# Altium PCB Lipol_battery_charger.PcbDoc
Units mm, origin at the board's own origin, x right, y up, seen from the top; angles counter-clockwise.
Board outline 66.04 x 66.04 mm, 2 copper layers (Top Layer, Bottom Layer); 22 components, 10 nets, 59 pads, 9 vias.
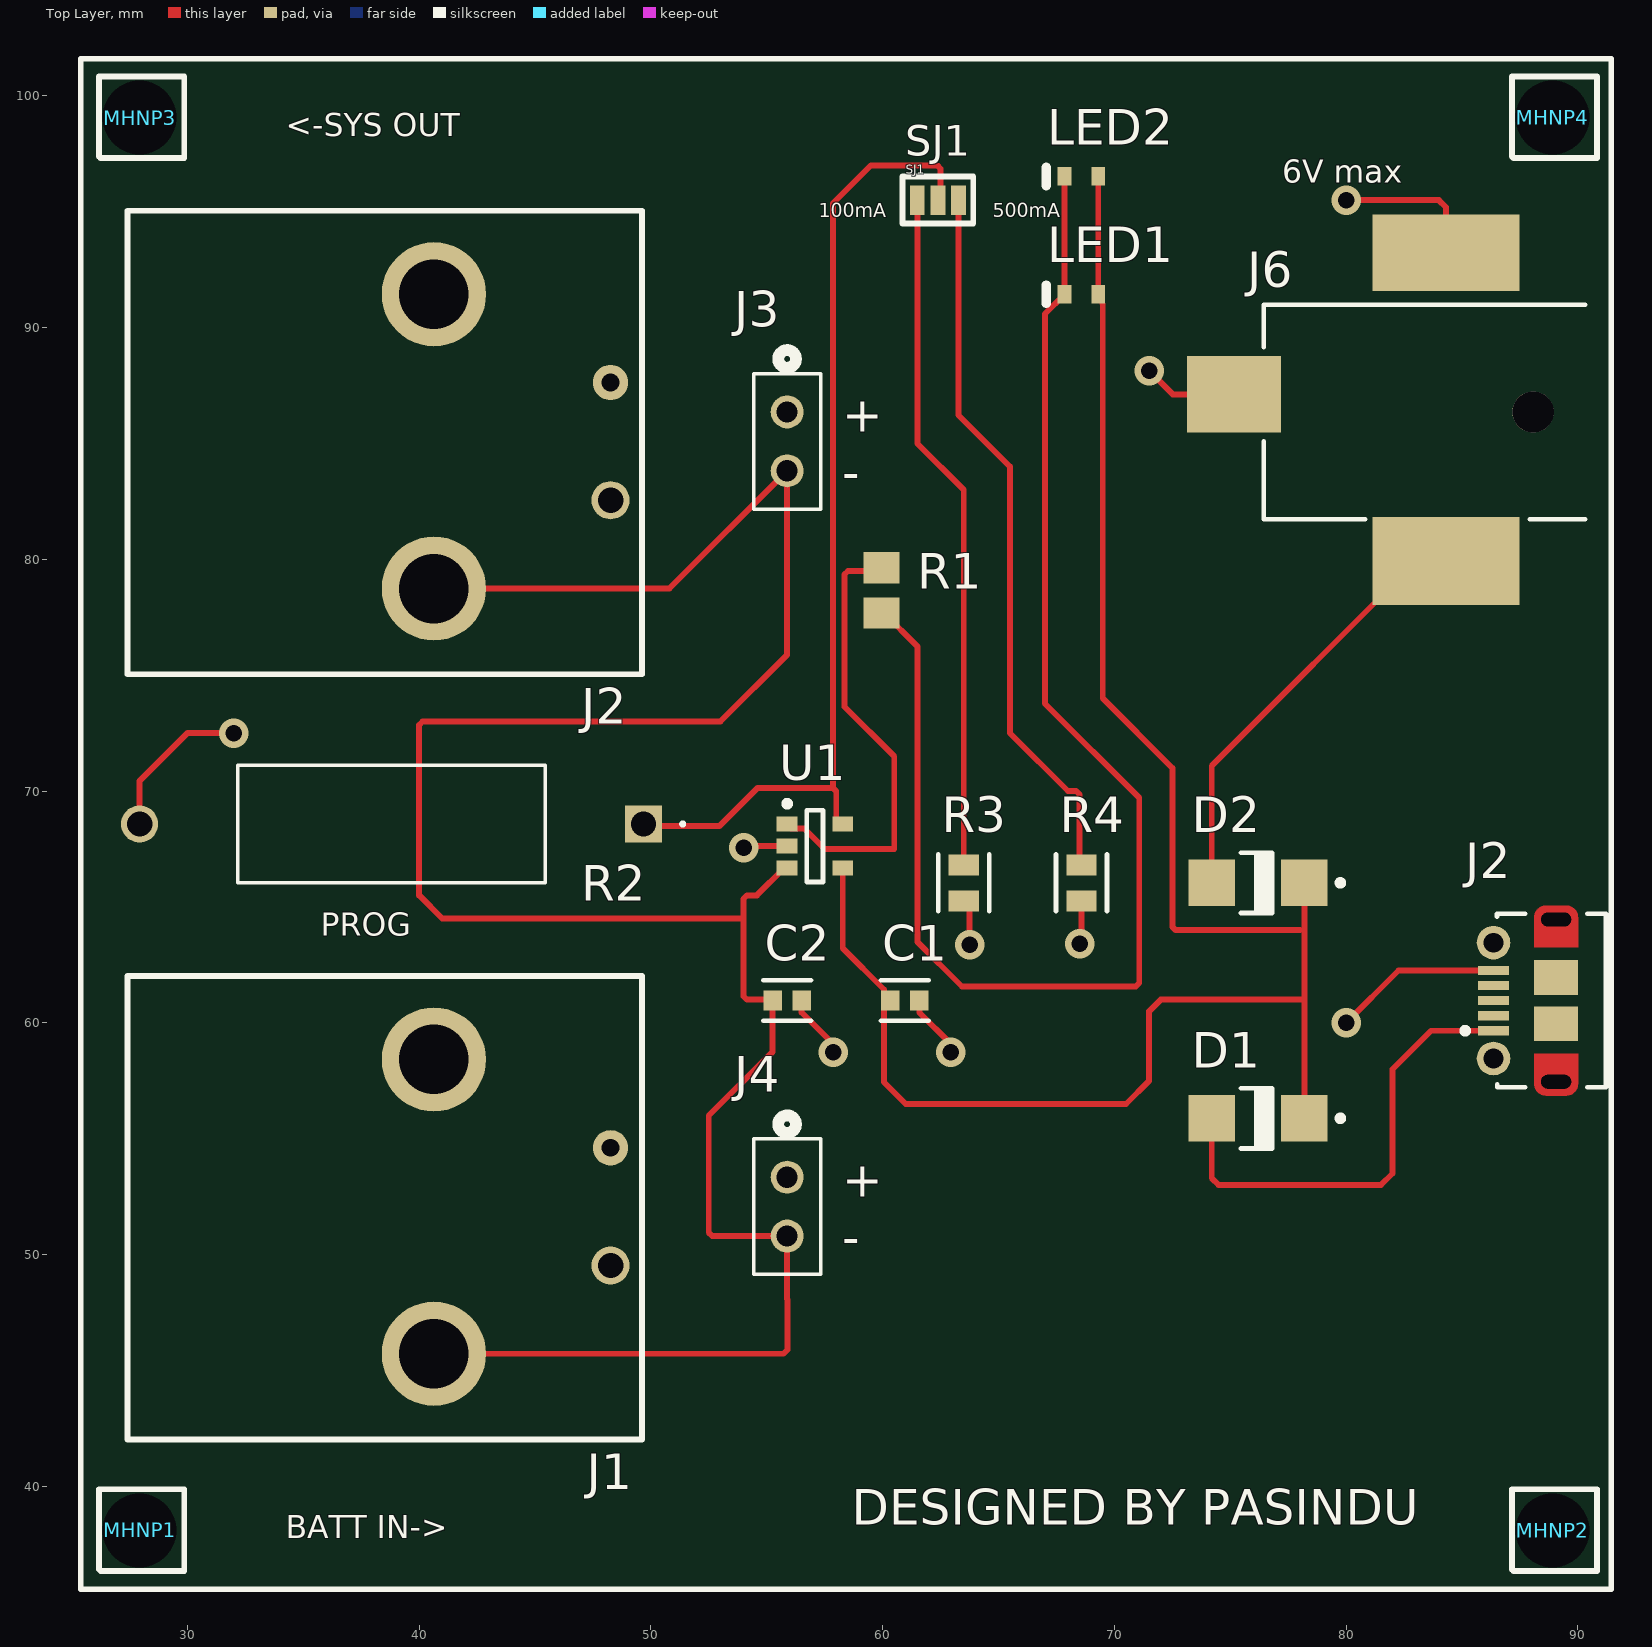
[diagram p0: Top Layer view]
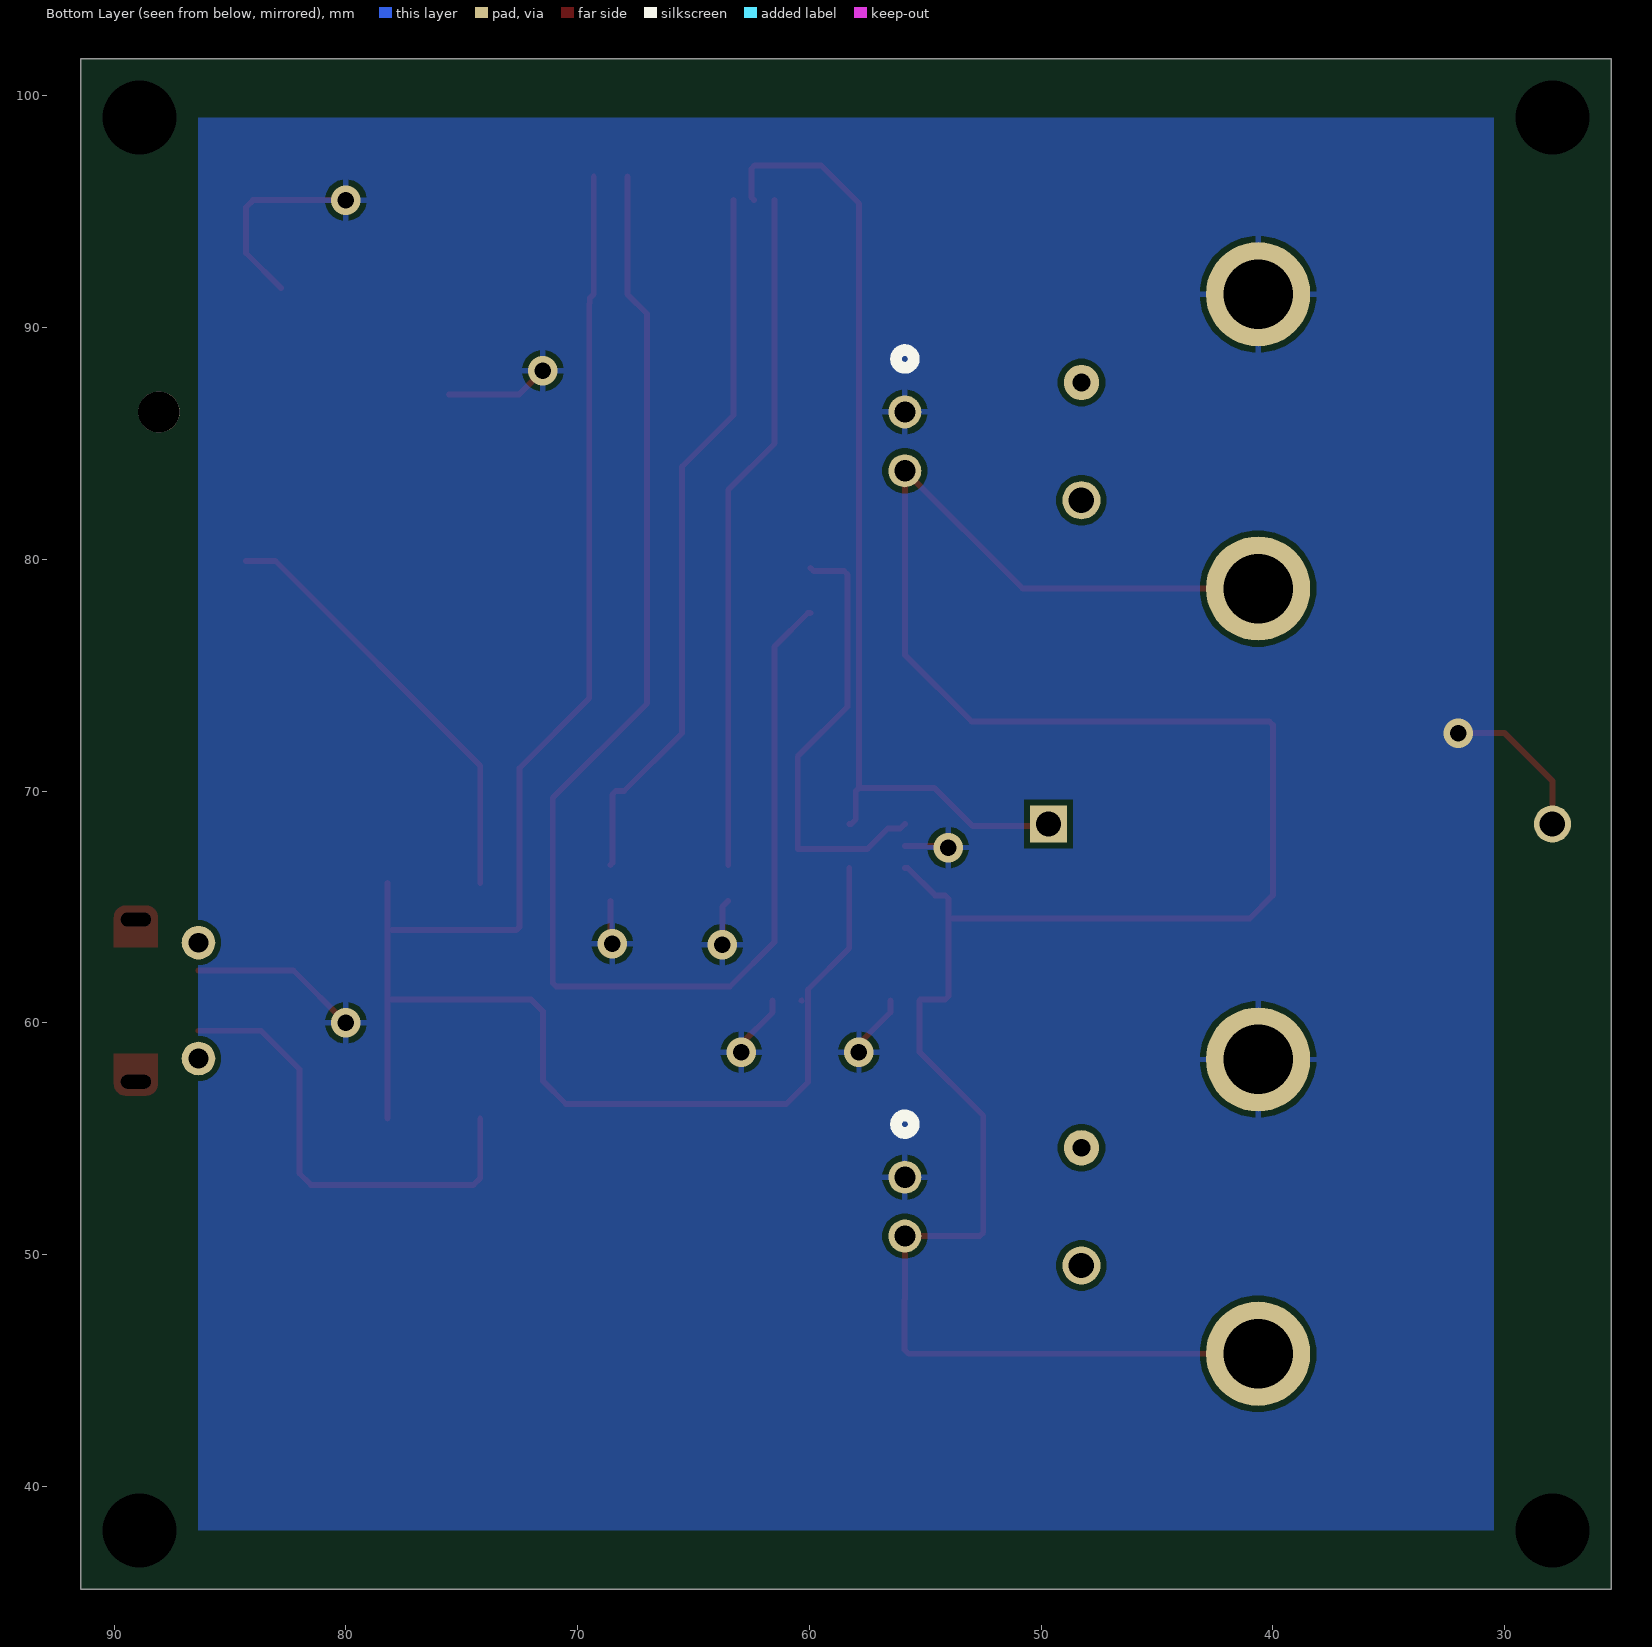
[diagram p1: Bottom Layer view, seen from below]
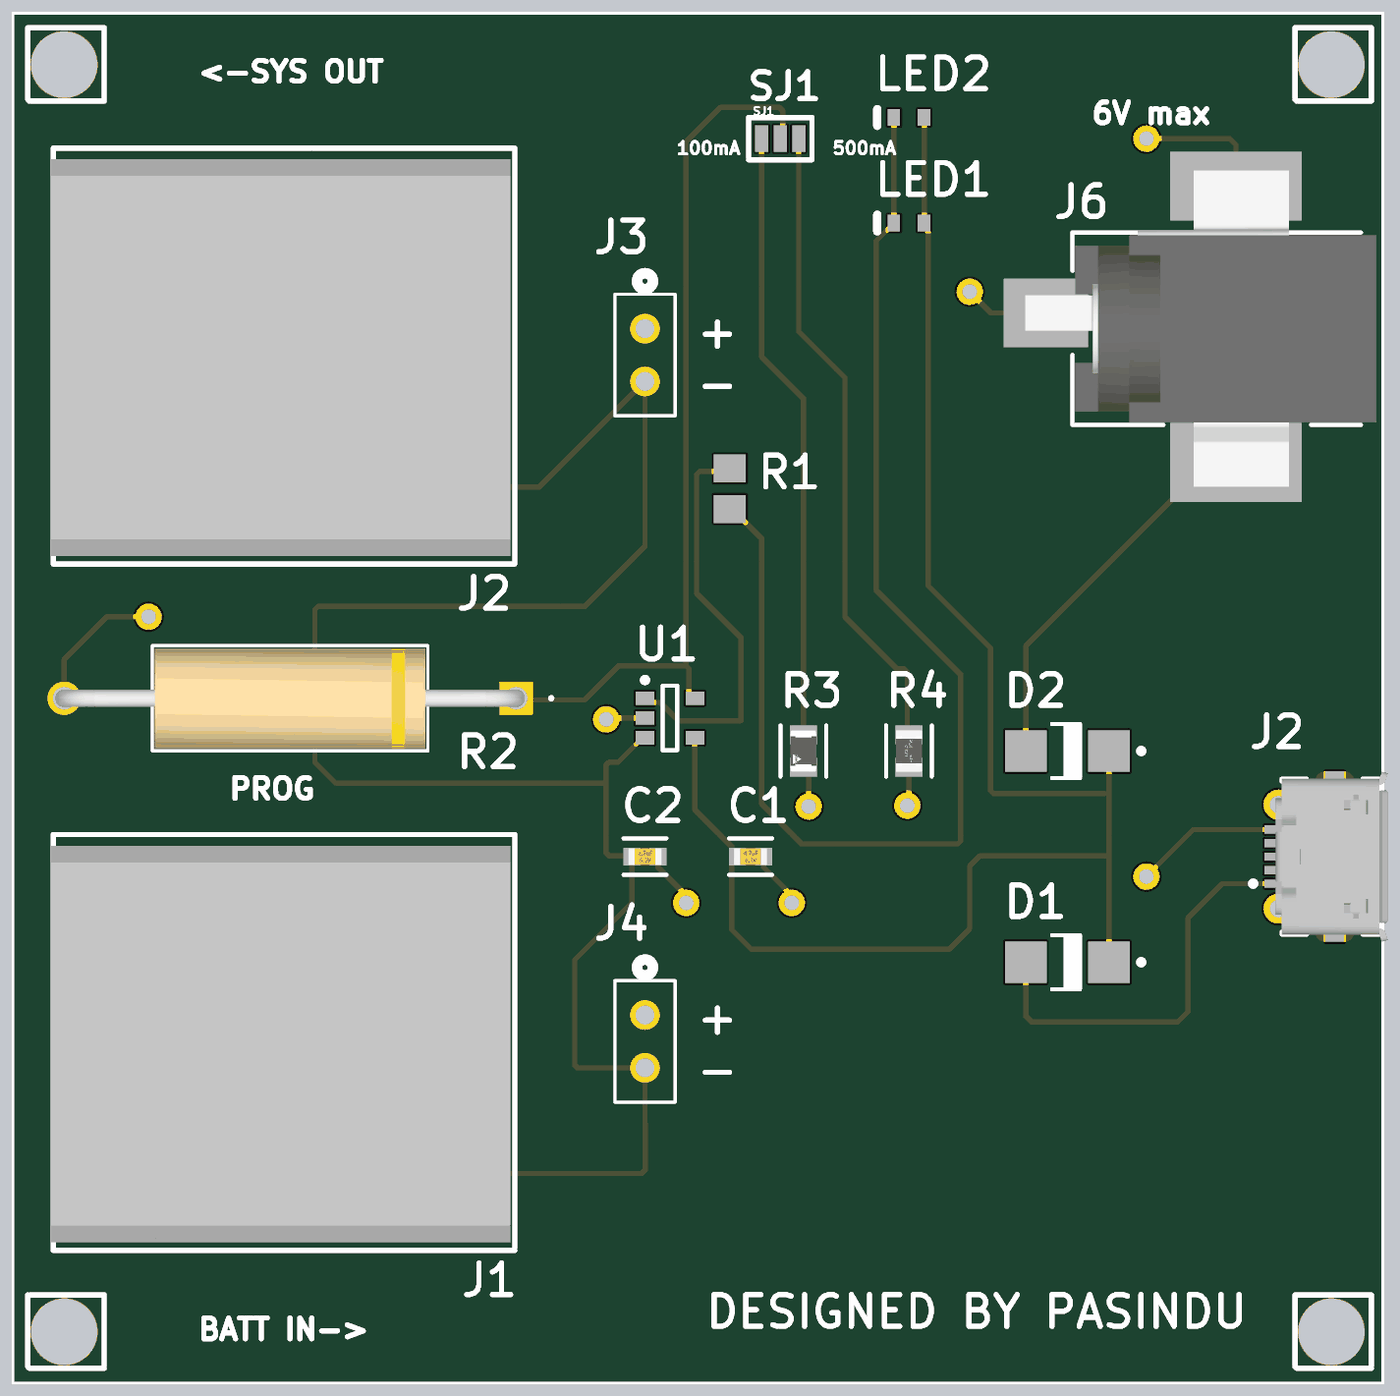
[diagram p2: 3D render of the assembled board from above, using the file's embedded part models]

## Layer stack, top to bottom
Top Solder: solder mask 0.0102, Solder Resist, Dk 3.5
Top Layer: signal copper 0.0356
Dielectric 1: dielectric 0.32, FR-4, Dk 4.8
Bottom Layer: signal copper 0.0356
Bottom Solder: solder mask 0.0102, Solder Resist, Dk 3.5

## Board outline
25.4,35.56 25.4,101.6 91.44,101.6 91.44,35.56

## Design rules (kind name [scope] priority, off if disabled: settings)
Clearance [All] p1: gap=0.254 ignorepadtopadclearanceinfootprint=FALSE
PolygonConnect [All] p1: connectstyle=Relief reliefconductorwidth=0.254 reliefentries=4 polygonreliefangle="90 Angle" airgapwidth=0.254
RoutingVias [All] p1: holewidth=0.711 width=1.27 viastyle="Through Hole" minholewidth=0.711 minwidth=1.27 maxholewidth=0.711 maxwidth=1.27
SolderMaskExpansion [All] p1: expansion=0.102 istentingtop=FALSE
SupplyNets "Schematic Supply Nets" [InNet('GND')] p1: voltage=0.000
Width [All] p1: maxlimit=0.254 minlimit=0.254 preferedwidth=0.254
30 further rules are at their usual default settings.

## Classes and differential pairs
component class Lipol_battery_charger: C1 C2 D1 D2 J3 J4 J6 LED1 LED2 MHNP1 MHNP2 MHNP3 MHNP4 R1 R2 R3 R4 SJ1 U1

## Components (designator, comment, footprint, x,y, rotation, side; value= is the part's Value field where it differs from the comment)
C1 "4.7uF" FP-CL10-IPC_C 60.96,60.96 r0 top
C2 "4.7uF" FP-CL10-IPC_C 55.88,60.96 r0 top
D1 "Diode1" ONSC-SMA-2-403D-02_V 76.2,55.88 r180 top
D2 "Diode2" ONSC-SMA-2-403D-02_V 76.2,66.04 r180 top
J1 "1-179276-2" 1-179276-2 40.64,58.42 r270 top
J2 "1-179276-2" 1-179276-2 40.64,91.44 r270 top
J2 "Micro-USB B Receptacle" USB-MICRO-B_V 87.71,60.96 r90 top
J3 "2POS VER HDR" CONN2_M20-999_1x2_HRW 55.88,86.36 r90 top
J4 "2POS VER HDR" CONN2_M20-999_1x2_HRW 55.88,53.34 r90 top
J6 "Power jack" FP-RASM722PTR13X-MFG 83.82,86.36 r90 top
LED1 "Red" VISH-TLMX1100_V 68.58,91.44 r180 top
LED2 "Red" VISH-TLMX1100_V 68.58,96.52 r180 top
MHNP1 "Mounting hole non plated 3.2mm" MHNP3P2MM 27.94,38.1 r90 top
MHNP2 "Mounting hole non plated 3.2mm" MHNP3P2MM 88.9,38.1 r90 top
MHNP3 "Mounting hole non plated 3.2mm" MHNP3P2MM 27.94,99.06 r90 top
MHNP4 "Mounting hole non plated 3.2mm" MHNP3P2MM 88.9,99.06 r90 top
R1 "330" RESC2013X70X40ML20T20 59.96,78.66 r90 top
R2 "PROG" RES_AC03_VIS 49.682,68.58 r180 top
R3 "2k" FP-CRCW0805-HPe3-IPC_C 63.5,66.04 r90 top
R4 "10k" FP-CRGCQ0805-IPC_C 68.58,66.04 r90 top value=10KΩ
SJ1 "SJUMPER3POS" SJUMPER3POS-Footprint-1 62.389,95.5 r0 top
U1 "MCP73811T-420I/OT" SOT-23-OT5_L 57.08,67.63 r0 top

## Footprints (in the part's own frame and the unit in brackets; to place one, negate y for a bottom-side part, rotate by r counter-clockwise, add the part's x,y. Pads: shape width x height; smd on the part's side, far side on the other; paste and mask are expansions set on the pad)
1-179276-2 [mm] "2_PCS_HDR_19.08X22.1MM"
  round 4.5 hole 3: ""(0,0) ""(12.7,0)
  round 1.524 hole 0.762: ""(3.81,7.62)
  round 1.65 hole 1.1: ""(8.89,7.62)
  silkscreen extent -3.6,-13.23 16.4,8.97, body extent -3.07,-13.33 16.02,8.78, height 10.86
CONN2_M20-999_1x2_HRW [mil]
  round 56 / inner round 60 / far side round 56 hole 36 paste-99999 mask+0: 1(0,0) 2(-100,0)
  silkscreen extent -165,-57 105,57
FP-CL10-IPC_C [mm]
  rect 0.806x0.858 smd paste+0 mask+0: 1(-0.626,0) 2(0.626,0)
  silkscreen extent -1.03,-0.87 1.03,0.87, body extent -1.13,-0.58 1.13,0.58, height 0.25
FP-CRCW0805-HPe3-IPC_C [mm]
  rect 0.906x1.308 smd paste+0 mask+0: 1(-0.776,0) 2(0.776,0)
  silkscreen extent -1.23,-1.1 1.23,1.1, body extent -1.33,-0.8 1.33,0.8, height 0.25
FP-CRGCQ0805-IPC_C [mm]
  rect 0.906x1.31 smd paste+0 mask+0: 1(-0.776,0) 2(0.776,0)
  silkscreen extent -1.23,-1.1 1.23,1.1, body extent -1.33,-0.8 1.33,0.8, height 0.25
FP-RASM722PTR13X-MFG [mm]
  rect 3.3x4.06 smd paste+0 mask+0: 1(0.76,8.65)
  rect 3.81x6.35 smd paste+0 mask+0: 2(-6.43,-0.49)
  rect 3.3x6.35 smd paste+0 mask+0: 3(6.86,-0.49)
  round 1.78 hole 1.78 unplated paste-2539.97 mask+0: ""(0,-4.25)
  silkscreen extent -4.63,-6.5 4.63,7.38, body extent -8.43,-7.48 8.61,10.78, height 0.25
MHNP3P2MM [mm] "Mountimg hole non plated 3.2mm"
  round 1 hole 3.2: ""(0,0)
  silkscreen extent -1.75,-1.92 1.78,1.75
ONSC-SMA-2-403D-02_V [mm] "Molded, 2-Leads, Body 4.57x2.92mm"
  rect 2x2 smd: 1(-2,0) 2(2,0)
  silkscreen extent -3.67,-1.3 0.74,1.3, body extent -2.16,-1.3 2.16,1.3, height 2.2
RES_AC03_VIS [mil]
  rect 63x63 / inner round 60 / far side rect 63x63 hole 43 paste-99999 mask+0: 1(0,0)
  round 63 hole 43 paste-99999 mask+0: 2(856,0)
  silkscreen extent -70,-99 689,100, body extent -16,-95 873,95, height 189
RESC2013X70X40ML20T20 [mm] "Chip Resistor, 2-Leads, Body 2.00x1.25mm, IPC Low Density"
  rect 1.35x1.55 smd: 1(-0.975,0) 2(0.975,0)
  body extent -1.1,-0.72 1.1,0.72, height 0.7
SJUMPER3POS-Footprint-1 [mil]
  rect 25x50 smd: 1(-35,0) 2(0,0) 3(35,0)
  silkscreen extent -60,-40 60,40
SOT-23-OT5_L [mm] "SOT23, 5-Leads, Body 2.9x1.7mm, Pitch 0.95mm, Lead Span 2.8mm, IPC High Density"
  rect 0.9x0.65 smd: 1(-1.2,0.95) 2(-1.2,0) 3(-1.2,-0.95) 4(1.2,-0.95) 5(1.2,0.95)
  silkscreen extent -1.32,-1.55 0.35,1.95, body extent -0.9,-1.55 0.9,1.55, height 1.45
USB-MICRO-B_V [mm] "USB, MICRO B, Body 7.491x4.695 mm, Pitch 0.65 mm"
  rect 0.4x1.35 smd: 1(-1.3,1.35) 2(-0.65,1.35) 3(0,1.35) 4(0.65,1.35) 5(1.3,1.35)
  round 1.45 hole 0.85: 6(-2.5,1.35) 7(2.5,1.35)
  rrect50% 0x0 hole 0.6 slot 1.3 at 90 deg: 8(-3.5,-1.35) 11(3.5,-1.35)
  rect 1.5x1.9 smd: 9(-1,-1.35) 10(1,-1.35)
  Top Layer circle w0.5: c-3.6,-1.8 r0.25
  Top Layer circle w0.5: c-3.6,-0.9 r0.25
  Top Layer circle w0.5: c3.6,-1.8 r0.25
  Top Layer circle w0.5: c3.6,-0.9 r0.25
  Top Layer region: -3.6,-1.8 -3.6,-0.9 -4.1,-0.9 -4.1,-1.8
  Top Layer region: 3.6,-0.9 3.6,-1.8 4.1,-1.8 4.1,-0.9
  Top Layer region: 2.3,-0.4 2.3,-2.3 3.6,-2.3 3.6,-0.4
  Top Layer region: -2.3,-2.3 -2.3,-0.4 -3.6,-0.4 -3.6,-2.3
  silkscreen extent -3.75,-3.5 3.75,2.7, body extent -4.1,-3.9 4.1,1.5, height 2.67
VISH-TLMX1100_V [mm] "SMD, 2-Leads, Body 1.6x0.8mm"
  rect 0.6x0.8 smd: 1(-0.725,0) 2(0.725,0)
  silkscreen extent 1.53,-0.4 1.53,0.4, body extent -0.8,-0.4 0.8,0.4, height 0.65

## Part data
C1 C2: library part CMP-2000-06096-2, "CAP CER 4.7UF 6.3V X7R 0603", Manufacturer=Samsung, Manufacturer Part Number=CL10B475KQ8NQNC, Package=CL10, Temperature="-55°C to +125°C", Temperature Characteristic=X7R, Temperature Coefficient=15%, Temperature Range High=+125°C, Temperature Range Low=-55°C, Tolerance=10%, Voltage Rating=6.3V, Automotive=No, Capacitance=4.7uF, Category=Cap, ComponentLink2Description=Datasheet, ComponentLink2URL=http://www.samsungsem.com/kr/support/product-search/mlcc/__icsFiles/afieldfile/2018/07/24/CL10B475KQ8NQNC.pdf, Device Class L1="Passive Components", Device Class L2=Capacitors, Device Class L3="Ceramic Capacitors", Digikey Description="CAP CER 4.7UF 6.3V X7R 0603", Height=0.95mm, Ipc Land Pattern Name=CAPC16080X80, Lead Free=Yes, Material=Ceramic, Mouser Description="C Series 0402 4.7 uF 6.3 V ±20 % Tolerance X5R SMT Multilayer Ceramic Capacitor", Octopart=https://octopart.com/cl10b475kq8nqnc-samsung-24957976, RoHS=TRUE
D1 D2: library part CMP-1055-00320-1, "Schottky Power Rectifier, 2-Pin SMA, Pb-Free, Tape and Reel", Manufacturer="On Semiconductor", PartNumber=MBRA140T3G, ComponentLink1Description="Manufacturer URL", ComponentLink1URL=http://www.onsemi.com/, ComponentLink2Description=Datasheet, ComponentLink2URL=http://www.onsemi.cn/pub_link/Collateral/MBRA140T3-D.PDF, ComponentLink3Description="Package Specification", ComponentLink3URL=http://www.onsemi.com/pub_link/Collateral/403D-02.PDF, Configuration=Single, DatasheetVersion="Rev. 10", IFSM Max (A)=30, Mounting Technology="Surface Mount", PackageDescription="2-Pin Small Molded Package, J-Bend Lead, Body 2.605 x 4.315 mm", PackageReference=SMA-2-403D-02, PackageVersion="Rev. G, 07/2012", Packing="Tape and Reel", RoHS=TRUE
J1 J2: "DYNAMIC 3200 HDR ASSY 2P H", Manufacture="TE connectivity", Supplier Part Number 1=7189696P, ComponentLink1Description="product URL", ComponentLink1URL=https://octopart.com/search?q=1-179276-2&filter%5Bfields%5D%5Bbrand.name%5D%5B%5D=TE+Connectivity, Manufacture part Number=1-179276-2, Supplier 1=Rs
J2: library part CMP-2000-05827-1, "Micro-USB B Receptacle, Right Angle, Bottom Mount, Surface Mount, with Solder Tabs, -30 to 85 degC, 5-Pin USB, RoHS, Tape and Reel", Manufacturer=Molex, Package Description="5-Leads USB, Micro B, Body 7.5 x 5 mm, Pitch 0.65 mm", Package Reference=MICRO-B, Package Version="Rev. F, 12/2012", Standard Package=1, Voltage - Max=30V, 3D Model=105017-0001.stp, Catalog Drawings=1050170001, Category=Connectors,Interconnects, Circuits=5, Connector Type=USB-microB, Datasheet URL=http://www.molex.com/elqNow/elqRedir.htm?ref=http://www.molex.com/webdocs/datasheets/pdf/en-us/1050170001_IO_CONNECTORS.pdf, Datasheet Version=03/2016, Family=USB,DVI,HDMIConnectors, Featured Product=Micro-USBConnectorsUSBConnectors, Features=Shielded,SolderRetention, Gender=Receptacle, Ingress Protection=-, Manufacturer URL=http://www.molex.com/, Mating Products=WM17145-ND-CABLEMICROUSBBTOSTDA1.0MWM17147-ND-CABLEMICROUSBBTOSTDA2.0MWM17146-ND-CABLEMICROUSBBTOSTDA1.5M, Mounting Technology=SurfaceMount, Mounting Type=BoardCutout,SurfaceMount,RightAngle, Number of Contacts=5, Online Catalog=Molex-MicroUSB, Other Names=WM1399DKR, Package URL=http://www.molex.com/pdm_docs/sd/1050170001_sd.pdf, Packaging=Digi-Reel®, PCN Assembly/Origin=ResinSupplier21/Oct/2015, RoHS Information=1050170001CertofCompliance, Series=-, Specifications=-
J3 J4: library part M20-9990246, "Connector Header Through Hole 2 position 0.100\" (2.54mm)", Mfr_Name=Harwin, ComponentLink1Description="New link", ComponentLink2Description="New link 1", ComponentLink2URL=https://www.digikey.com/en/products/detail/harwin-inc/M20-9990246/3728226, RefDes=RefDes, Type=Type
J6: library part CMP-47995-000002-1, "CONN PWR JACK 2.1X5.5MM SOLDER", Case/Package=SMD/SMT, Color=Black, Current Rating=5A, Package Quantity=120, Connector Type=Jack, Contact Material="Copper Alloy", Contact Plating=Tin, Gender=Male, Housing Color=Black, Housing Material=Thermoplastic, Mount="Surface Mount", Shielding=Unshielded, Termination=Solder
LED1 LED2: library part CMP-1666-00027-1, "LED, RED, 2.1 V, -40 to 100 degC, 2-Pin SMD (0603), RoHS, Tape and Reel", Capacitance="12 pF", Case Code (Imperial)=0603, Case Code (Metric)=1608, Max Operating Temperature=125degC, Min Operating Temperature=-55degC, Package Quantity=4000, Resistance="100000000000 Ohm", Tolerance=5%, Type (Capacitors)=C0G, Voltage Rating="50 V", Case/Package=0603, ComponentLink1Description="Manufacturer URL", ComponentLink1URL=http://www.vishay.com/, ComponentLink2Description=Datasheet, ComponentLink2URL=http://www.vishay.com/docs/83173/tlmb1100.pdf, DatasheetVersion="Rev. 2.7, 03/2016", Height="0.8 mm", Length="1.6 mm", Mount="Surface Mount", PackageDescription="2-Pin Surface Mount Device, Body 1.6 x 0.8 mm", PackageReference=TLMX1100, Packaging="Tape and Reel", Pins=2, Radiation Hardening=No, REACH SVHC="No SVHC", RoHSCompliant=True, Voltage Rating (DC)="50 V", Width="0.8 mm"
MHNP1 MHNP2 MHNP3 MHNP4: library part MTHNP3P2MM, "Mounting hole non plated 3.2mm drill hole"
R1: library part CMP-2001-00533-1, Manufacturer=Panasonic, Part Number=ERJ6ENF3301V
R2: library part CMP-00030-39745976-1, "AC03000001009JAC00 VISHAY AC03000001009JAC00 Through Hole Resistor, 10 ohm, Axial Leaded, 3 W, 5%, AC Series", Case/Package=Conformal, Max Operating Temperature=275°C, Max Power Dissipation=3W, Min Operating Temperature=0°C, Resistance=10Ω, Temperature Coefficient=-80ppm/°C, Tolerance=5%, Voltage Rating=5V, Composition=Wirewound, Contact Plating=Tin, Diameter=4.8mm, Features="Flame Retardant Coating", Lead Diameter=800µm, Length=13mm, Military Standard=Not, Mount="Through Hole", NexarPartId=39745976, Number of Pins=2, Number of Terminations=2, Packaging="Cut Tape (CT)", Power Rating=3W, Radiation Hardening=No, REACH SVHC=Unknown, RoHS=Compliant, Schedule B="8533210080, 8533210080", Termination=Axial, Voltage Rating (DC)=5V, Width=4.8006mm
R3: library part CMP-2001-04188-2, "RES Thick Film, 2kΩ, 1%, 0.5W, 100ppm/°C, 0805", Case Code (Imperial)=0805, Case Code (Metric)=2012, Max Operating Temperature=155°C, Min Operating Temperature=-55°C, Package Quantity=5000, Power Rating=330mW, Resistance=2kR, Temperature Coefficient=100ppm/°C, Tolerance=1%, Voltage Rating=150V, Case/Package=0805, Composition="Thick Film", Contact Plating=Tin, Depth=1.25mm, Height=0.5mm, Lead Free="Lead Free", Length=2mm, Military Standard=Not, Mount="Surface Mount", Packaging="Tape and Reel", Radiation Hardening=No, Termination=SMD/SMT, Weight=0.000194oz, Width=1.2mm
R4: library part CMP-03211-002989-1, "CRGCQ 0805 10K 5%", Ambient Temperature Range High=+70°C, Manufacturer="TE Connectivity", Manufacturer Part Number=CRGCQ0805J10K, Package=CRGCQ0805, Power Rating=0.125W, Resistance=10KΩ, Temperature="-55°C to +155°C", Temperature Coefficient=±100ppm/°C, Temperature Range High=+155°C, Temperature Range Low=-55°C, Tolerance=0.05, Voltage Rating=150V, Automotive=Yes, Automotive Grade="Grade 914", Category=Res, ComponentLink2Description=Datasheet, ComponentLink2URL=https://www.te.com/commerce/DocumentDelivery/DDEController?Action=showdoc&DocId=Data+Sheet%7F1773204-3%7F1%7Fpdf%7FEnglish%7FENG_DS_1773204-3_1.pdf%7F4-2176341-923, Composition="Thick Film", Device Class L1="Passive Components", Device Class L2=Resistors, Device Class L3="Chip SMD Resistors", Digikey Description="CRGCQ 0805 10K 5%", Height=0.65mm, Ipc Land Pattern Name=RESC200125X55, Lead Free=Yes, Mouser Description="Res Thick Film 0805 10K Ohm 5% 0.125W(1/8W) ±100ppm/C Pad SMD Automotive T/R", Octopart=https://octopart.com/crgcq0805j10k-te+connectivity-91018201, RoHS=TRUE, Series=CRGCQ
SJ1: library part CMP-001-0000-1, "Solder jumper 3 pads and pin", pin=3
U1: library part CMP-0133-00139-1, "Simple, Miniature Single-Cell, Fully Integrated Li-Ion/Li-Polymer Charge Management Controller, 4.2V, 5-Pin SOT-23, Industrial Temperature, Tape and Reel", Code_IPC=SOT23-5, DatasheetVersion="revB, Sep-2007", PackageDescription="5-Lead Plastic Small Outline Transistor (OT) [SOT-23]", PackageReference=SOT-23-OT5, PackageVersion="revBB, Aug-2009"

## Via types
v1: diameter 1.27, hole 0.711, Top Layer to Bottom Layer, 9 vias

## Nets (pads, with @x,y where several pads share a name; then routed paths per layer and width w, separated by ;. In a path a pad name is that pad's centre, name@x,y a point inside that pad or via, vN(x,y) a via of type N, cw(c..) or ccw(c..) an arc to the next point about the centre after c; other vN are vias at no path point)
GND: C1.2 C2.2 J1.@40.64,58.42 J2.5 J2.@40.64,91.44 J3.1 J4.1 J6.1 J6.3 R2.2 R3.1 R4.1 U1.2 | length 42.1
  Top Layer w0.254: R2.2 27.94,70.44 30,72.5 v1(32,72.5) ; J1.@40.64,58.42 40.64,59.36 40,60 40.259,60 J1.@40.64,60.381 ; v1(54.016,67.564) 54.082,67.63 U1.2 ; C2.2 56.506,60.448 57.861,59.093 v1(57.861,58.735) ; C1.2 61.586,60.448 62.941,59.093 v1(62.941,58.735) ; R3.1 63.754,65.01 v1(63.754,63.373) ; v1(68.5,63.414) 68.58,63.494 R4.1 ; v1(71.501,88.138) 72.519,87.12 J6.1 J6.1@75.55,87.12 ; v1(80,60) 82.26,62.26 J2.5 ; v1(80,95.5) 84,95.5 84.31,95.19 J6.3 J6.3@82.787,91.697
  Bottom Layer w0.254: J1.@40.64,58.42 J1.@40.797,58.577 ; J3.1 J3.1@55.88,86.62 ; v1@57.704,58.577 v1(57.861,58.735) ; v1(63.754,63.373) v1@63.817,63.436 ; v1(68.5,63.414) 68.477,63.436 68.437,63.436 v1@68.5,63.5 ; v1@79.994,95.494 v1(80,95.5)
NetC1_1: C1.1 D1.1 D2.1 LED1.1 LED2.1 U1.4 | length 81.6
  Top Layer w0.254: U1.4 58.28,63.22 60.058,61.442 60.058,57.442 61,56.5 70.5,56.5 71.5,57.5 71.5,60.5 72,61 78.16,61 78.2,60.96 ; C1.1@60.332,60.958 60.334,60.956 C1.1 ; LED2.1 LED1.1 69.478,91.267 69.478,91.04 69.5,91.018 69.5,74 72.5,71 72.5,64.149 72.649,64 78,64 ; D1.1 78.2,60.96 ; D2.1 78.2,60.96
NetC2_1: C2.1 J1.@40.64,45.72 J2.@40.64,78.74 J3.2 J4.2 U1.3 | length 107
  Top Layer w0.254: J1.@40.64,45.72 55.72,45.72 55.895,45.895 55.895,48.07 55.88,48.085 J4.2 52.649,50.8 52.5,50.949 52.5,56 55.254,58.754 C2.1 55.214,61 54.149,61 54,61.149 54,64.5 ; J2.@40.64,78.74 50.8,78.74 J3.2 55.88,75.88 53,73 40.149,73 40,72.851 40,65.5 41,64.5 54,64.5 ; U1.3 55.755,66.68 54.575,65.5 54.149,65.5 54,65.351 54,64.5
NetD1_2: D1.2 J2.1 | length 20.3
  Top Layer w0.254: D1.2 74.2,53.3 74.5,53 81.5,53 82,53.5 82,58 83.66,59.66 J2.1
NetD2_2: D2.2 J6.2 | length 18.8
  Top Layer w0.254: D2.2 74.2,71.09 83.04,79.93 J6.2
NetLED1_2: LED1.2 LED2.2 R1.1 | length 62.1
  Top Layer w0.254: R1.1 60.06,77.685 61.5,76.245 61.5,63.5 63.429,61.571 70.922,61.571 71.071,61.72 71.071,69.711 67,73.782 67,90.585 LED1.2 ; LED1.2@67.855,91.5 LED2.2
NetR1_2: R1.2 U1.1 | length 19.5
  Top Layer w0.254: U1.1 56.078,68.382 56.618,68.382 57.5,67.5 60.5,67.5 60.5,71.5 58.359,73.641 58.359,79.351 58.508,79.5 59.825,79.5 R1.2
NetR2_1: R2.1 SJ1.2 U1.5 | length 42.7
  Top Layer w0.254: R2.1 49.762,68.5 52.966,68.5 54.607,70.141 57.851,70.141 ; U1.5 58.198,68.58 58,68.778 58,69.992 57.851,70.141 ; SJ1.2 62.5,95.611 62.5,96.851 62.351,97 59.5,97 57.851,95.351 57.851,70.141
NetR3_2: R3.2 SJ1.1 | length 29.5
  Top Layer w0.254: SJ1.1 61.5,85 63.5,83 R3.2
NetR4_2: R4.2 SJ1.3 | length 31.1
  Top Layer w0.254: SJ1.3 63.278,86.222 65.5,84 65.5,72.5 68,70 68.351,70 68.5,69.851 68.5,66.896 R4.2
pads on no net: J1.@48.26,49.53 J1.@48.26,54.61 J2.2 J2.3 J2.4 J2.6 J2.7 J2.8 J2.9 J2.10 J2.11 J2.@48.26,82.55 J2.@48.26,87.63 J6. MHNP1. MHNP2. MHNP3. MHNP4.

## Polygon pours and split planes (outlines as drawn)
GND on Bottom Layer "GND_L02_P000" (solid, pour order 0): 30.48,99.06 30.48,38.1 86.36,38.1 86.36,99.06 76.2,99.06

## Silkscreen, mask and mechanical layers (free items; w line width, h text height)
Top Overlay:
  lines w0.254: 25.4,35.56 72.39,35.56 ; 25.4,35.56 25.4,101.6 91.44,101.6 91.44,35.56 72.39,35.56 ; 25.4,35.56 72.39,35.56
  text "<-SYS OUT" at 34.254,98.254 h1
  text "6V max" at 77.254,96.254 h1
  text "100mA" at 57.254,94.754 h0.6
  text "500mA" at 64.754,94.754 h0.6
  text "+" at 58.254,85.5 h1.52
  text "-" at 58.254,82.992 h1.52
  text "PROG" at 35.754,63.754 h1
  text "+" at 58.254,52.5 h1.52
  text "-" at 58.254,49.992 h1.52
  text "DESIGNED BY PASINDU" at 58.674,38.354 h1.52
  text "BATT IN->" at 34.254,37.754 h1

## Text inside footprints (layer, text, board x,y; h text height)
J2: Mechanical 1 "PCB EDGE" at 90.61,53.76 h0.3 r90